# Altium PCB Template_4L.PcbDoc
Units mm, origin at the board's own origin, x right, y up, seen from the top; angles counter-clockwise.
Board outline 146.95 x 87.7 mm, 5 copper layers (Top Layer, Mid-Layer 1, Mid-Layer 2, Mid-Layer 3, Bottom Layer), stack 1.974 mm thick; 9 components, 0 nets, 17 pads, 0 vias.
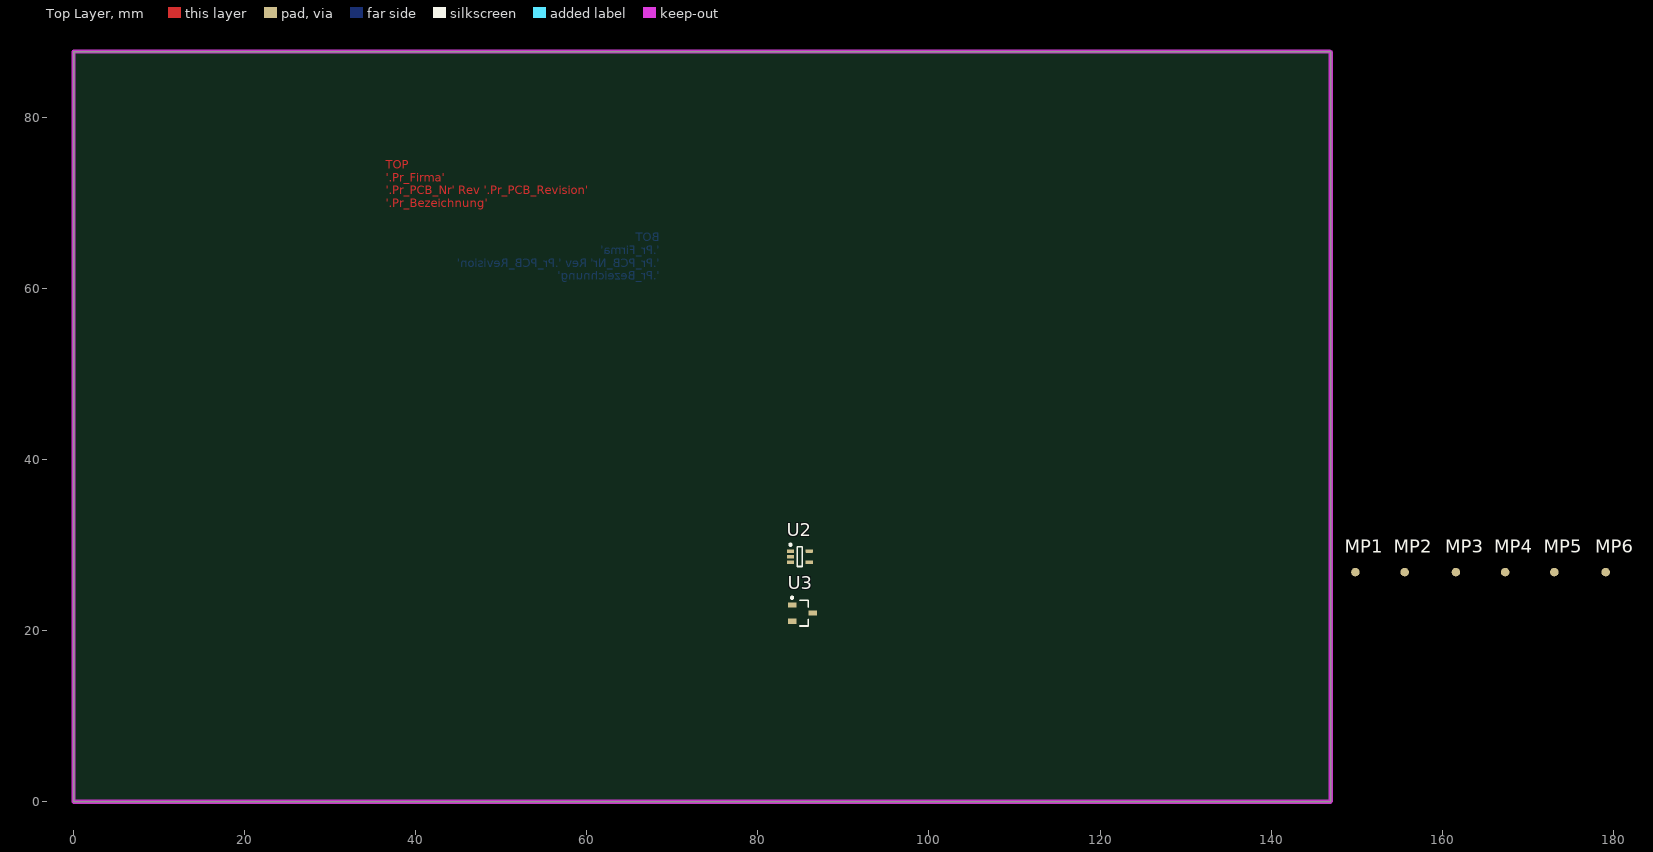
[diagram p0: Top Layer view]
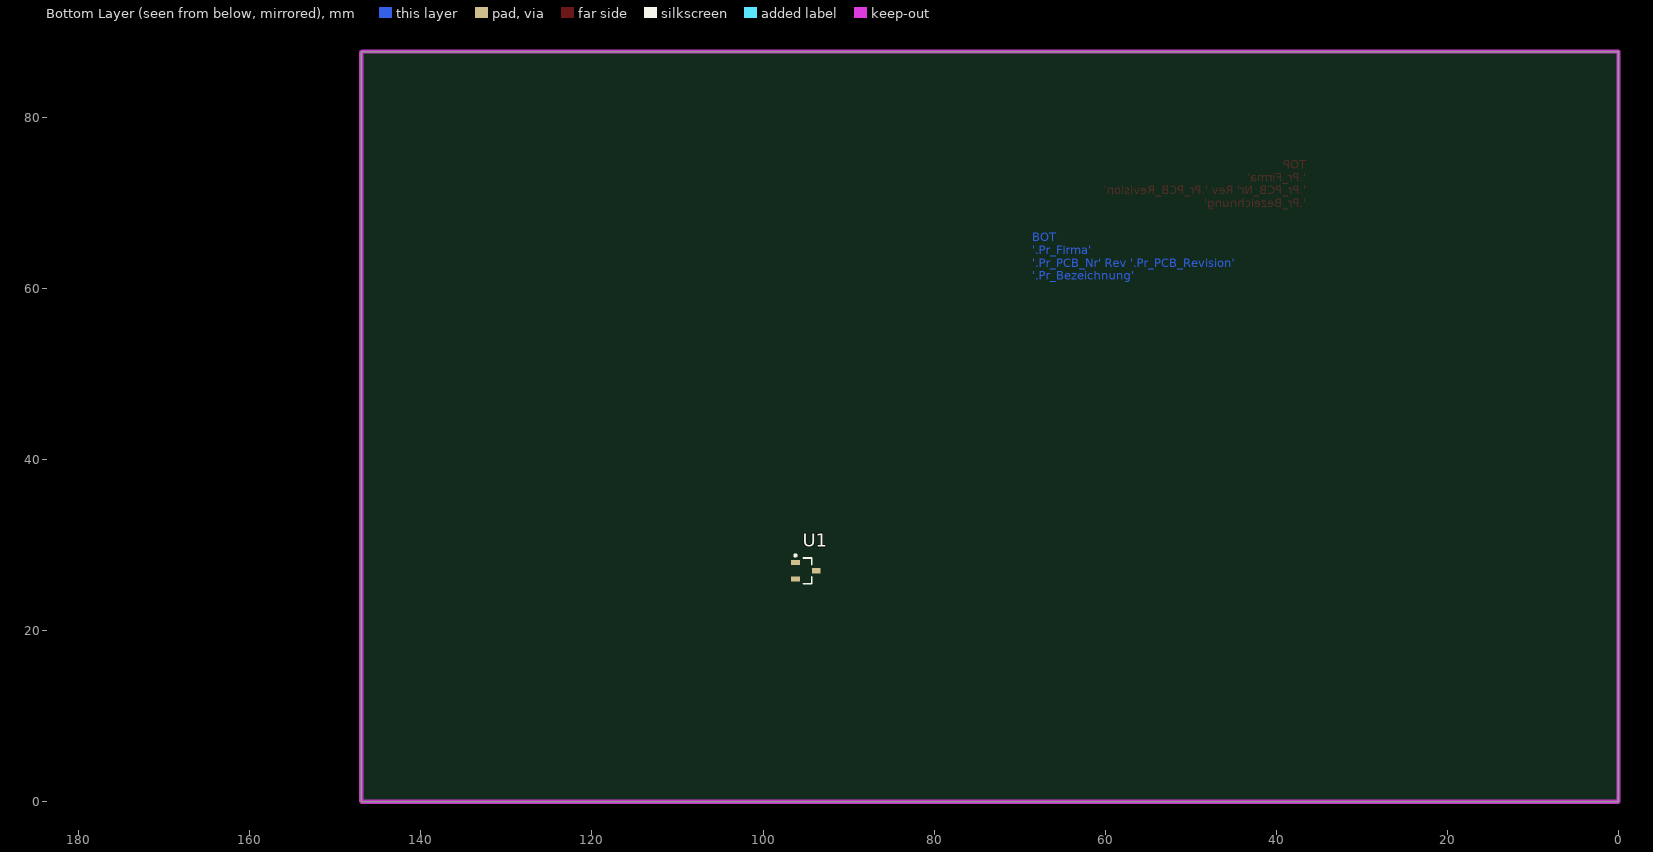
[diagram p1: Bottom Layer view, seen from below]
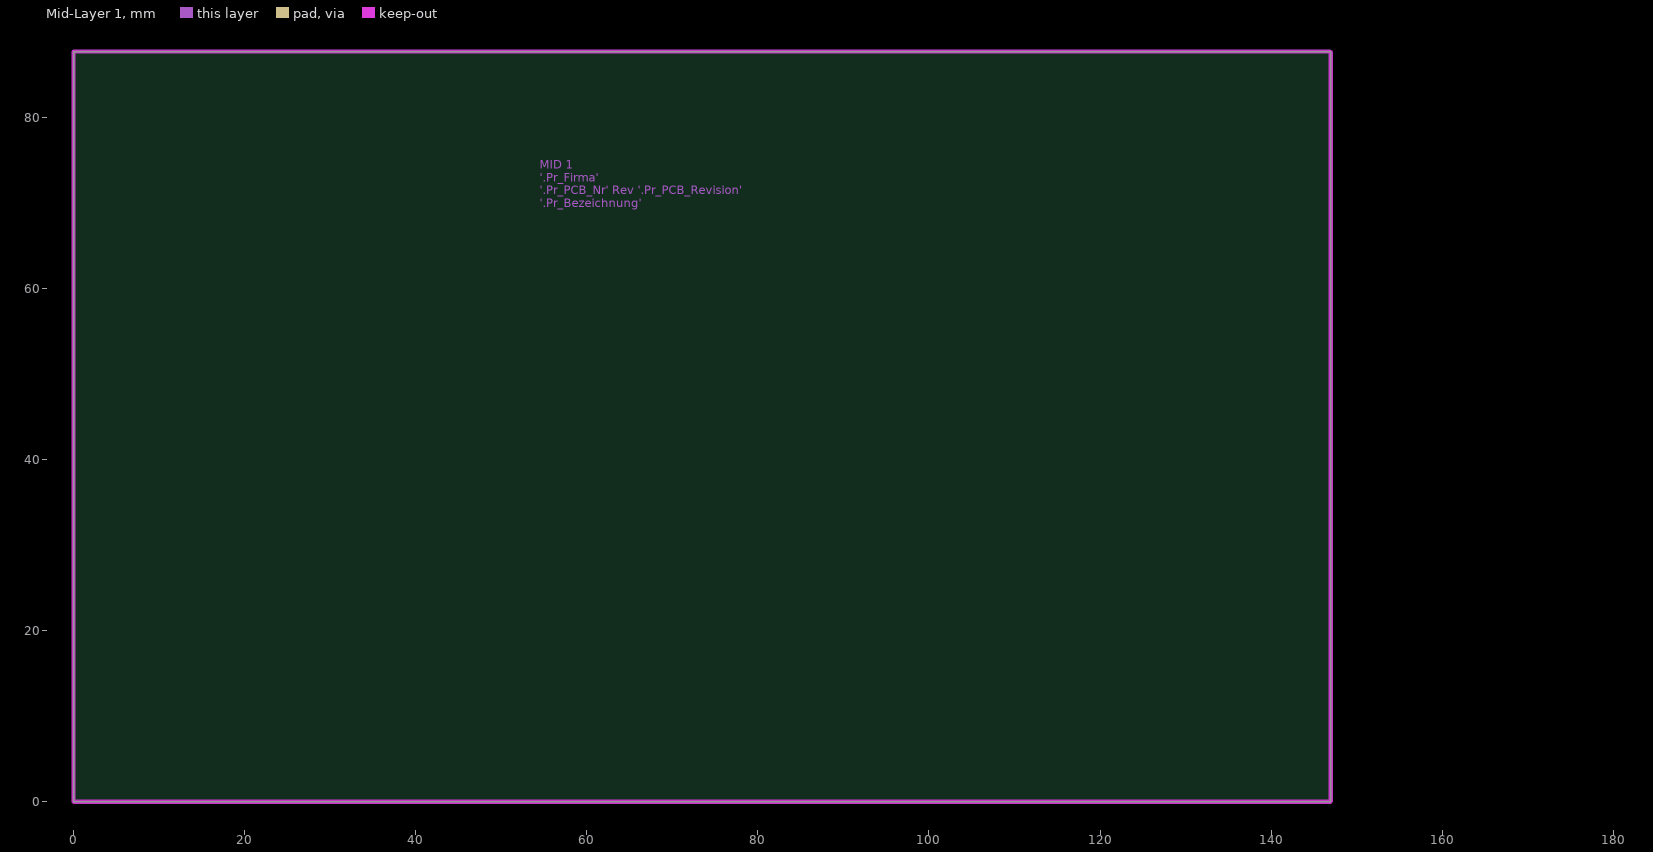
[diagram p2: Mid-Layer 1]
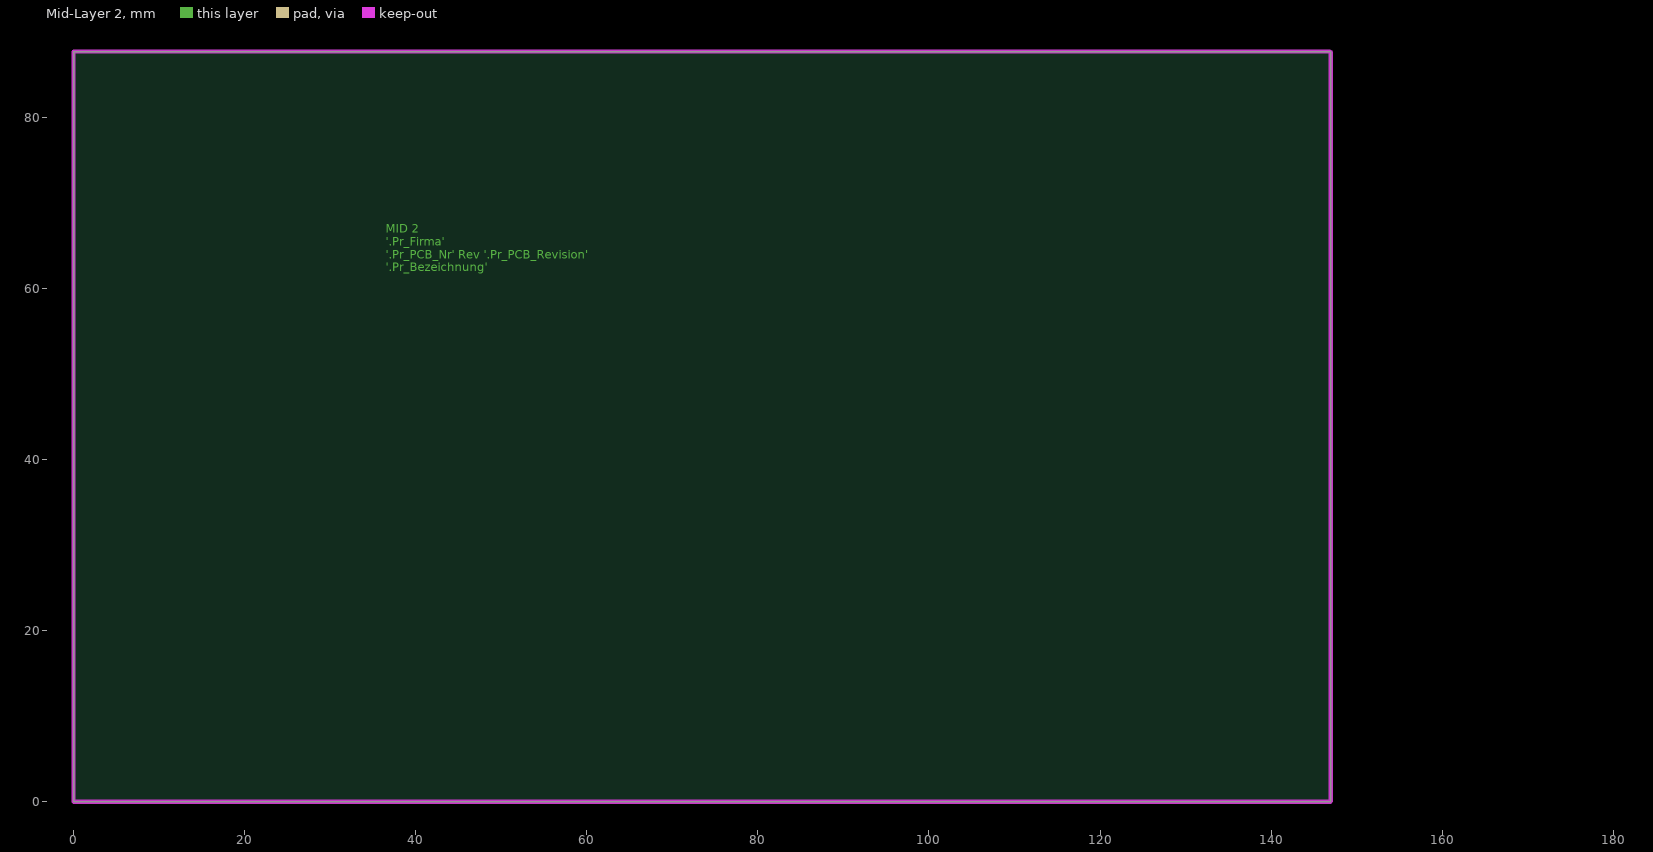
[diagram p3: Mid-Layer 2]

## Layer stack, top to bottom
Top Solder: solder mask 0.0102, Solder Resist, Dk 3.5
Top Layer: signal copper 0.018
Pregrep 1: prepreg 0.156, Dk 4.2
Mid-Layer 1: signal copper 0.035
Dielectric2: core 1.2, FR-4, Dk 4.2
Mid-Layer 2: signal copper 0.035
Pregrep 2: prepreg 0.156, Dk 4.2
Mid-Layer 3: signal copper 0.0356
Dielectric4: dielectric 0.32, FR-4, Dk 4.8
Bottom Layer: signal copper 0.018
Bottom Solder: solder mask 0.0102, Solder Resist, Dk 3.5

## Board outline
0,0.1 ccw(c0.1,0.1) 0.1,0 146.85,0 ccw(c146.85,0.1) 146.95,0.1 ccw(c146.85,0.1) 146.937,0.15 ccw(c146.85,0.2) 146.95,0.2 146.95,87.6 ccw(c146.85,87.6) 146.85,87.7 0.1,87.7 ccw(c0.1,87.6) 0,87.6

## Design rules (kind name [scope] priority, off if disabled: settings)
AcuteAngle [All] p1: minimum=6.00000000000000E+0001 checktracksonly=FALSE
BoardOutlineClearance [All] p1: gap=0.2 ignorepadtopadclearanceinfootprint=FALSE
Clearance Clearance-xPP-xTP-xTT [All] p1: gap=0.15 ignorepadtopadclearanceinfootprint=FALSE except(0: Arc-Hole Track-Hole SMDPad-Hole THPad-Hole Via-Hole Fill-Hole Poly-Hole Region-Hole Text-Hole)
ComponentClearance [All] p1: gap=0.25 collisioncheckmode=3 verticalgap=0.25 showdistances=FALSE
DiffPairsRouting Diffpairs_USB [All] p1: maxlimit=0.25 minlimit=0.15 mostfreqgap=0.25 toplayer_prefgap=0.22 toplayer_minwidth=0.15 toplayer_maxwidth=0.25 toplayer_prefwidth=0.22 midlayer1_mingap=0.25 midlayer1_minwidth=0.381 midlayer1_maxwidth=0.381 midlayer1_prefwidth=0.381 midlayer2_mingap=0.25 midlayer2_minwidth=0.381 midlayer2_maxwidth=0.381 midlayer2_prefwidth=0.381 midlayer3_mingap=0.25 midlayer3_minwidth=0.381 midlayer3_maxwidth=0.381 midlayer3_prefwidth=0.381 bottomlayer_mingap=0.25 bottomlayer_minwidth=0.381 bottomlayer_maxwidth=0.381 bottomlayer_prefwidth=0.381 maxuncoupledlength=12.5
DiffPairsRouting Diffpairs_ETH [All] p2: maxlimit=0.3 minlimit=0.15 mostfreqgap=0.25 toplayer_prefgap=0.3 toplayer_minwidth=0.15 toplayer_maxwidth=0.2 toplayer_prefwidth=0.2 midlayer1_mingap=0.25 midlayer1_maxgap=0.25 midlayer1_minwidth=0.381 midlayer1_maxwidth=0.381 midlayer1_prefwidth=0.381 midlayer2_mingap=0.25 midlayer2_maxgap=0.25 midlayer2_minwidth=0.381 midlayer2_maxwidth=0.381 midlayer2_prefwidth=0.381 midlayer3_mingap=0.25 midlayer3_maxgap=0.25 midlayer3_minwidth=0.381 midlayer3_maxwidth=0.381 midlayer3_prefwidth=0.381 bottomlayer_mingap=0.25 bottomlayer_maxgap=0.25 bottomlayer_minwidth=0.381 bottomlayer_maxwidth=0.381 bottomlayer_prefwidth=0.381 maxuncoupledlength=12.5
DiffPairsRouting DiffPairsRouting_1 [All] p3: maxlimit=0.254 minlimit=0.254 mostfreqgap=0.254 toplayer_minwidth=0.381 toplayer_maxwidth=0.381 toplayer_prefwidth=0.381 midlayer1_minwidth=0.381 midlayer1_maxwidth=0.381 midlayer1_prefwidth=0.381 midlayer2_minwidth=0.381 midlayer2_maxwidth=0.381 midlayer2_prefwidth=0.381 midlayer3_minwidth=0.381 midlayer3_maxwidth=0.381 midlayer3_prefwidth=0.381 bottomlayer_minwidth=0.381 bottomlayer_maxwidth=0.381 bottomlayer_prefwidth=0.381 maxuncoupledlength=12.7
Height [All] p1: minheight=0 maxheight=25 prefheight=12.5
HoleSize HoleSize-PTH [All] p1: absolutevalues=TRUE maxlimit=5 minlimit=0.25 maxpercent=80.000 minpercent=20.000
HoleToHoleClearance [All] p1: gap=0.15 allowstackedmicrovias=TRUE
MatchedLengths MatchLengths_xSignals_X181_U100 [InxSignalClass('xSignals_X181_U100_MatchLengthsClass')] p1: tolerance=0.1 checknetsindiffpair=FALSE checkdiffpairvsdiffpair=TRUE checkxsignals=TRUE checkothers=TRUE
MatchedLengths MatchLengths_xSignals_X180_U100 [InxSignalClass('xSignals_X180_U100_MatchLengthsClass')] p2: tolerance=0.1 checknetsindiffpair=FALSE checkdiffpairvsdiffpair=TRUE checkxsignals=TRUE checkothers=TRUE
MinimumAnnularRing "Minimum IAR  >0.45mm" [((ObjectKind = 'Pad') OR (ObjectKind = 'Via')) And (Layer = 'MultiLayer') And (HoleDiameter > AsMM(0.45))] p1: minimumring=0.25 // minimum inner annular ring for pads > 0.45mm finished hole size
MinimumAnnularRing "Minimum IAR <=0.45mm" [((ObjectKind = 'Pad') OR (ObjectKind = 'Via')) And (Layer = 'MultiLayer') And (HoleDiameter <= AsMM(0.45))] p2: minimumring=0.15 // minimum inner annular ring for pads <= 0.45mm finished hole size
MinimumSolderMaskSliver [All] p1: minsoldermaskwidth=0.025
PlaneClearance PlaneClearance-IPI [All] p1: clearance=0.2
PlaneConnect NetTie [HasFootprint('NETTIE_TH')] p1: planeconnectstyle=Direct reliefexpansion=0.508 reliefentries=4 reliefconductorwidth=0.254 reliefairgap=0.254
PlaneConnect [All] p2: pad.planeconnectstyle=Relief pad.reliefexpansion=0.4 pad.reliefentries=4 pad.reliefconductorwidth=0.2 pad.reliefairgap=0.2 via.planeconnectstyle=Direct via.reliefexpansion=0.4 via.reliefentries=4 via.reliefconductorwidth=0.2 via.reliefairgap=0.2
PolygonConnect Nettie_polygon [HasFootprint('NETTIE_TH')] p1: connectstyle=Direct reliefconductorwidth=0.254 reliefentries=4 polygonreliefangle="90 Angle" airgapwidth=0.254
PolygonConnect HIGH_CURRENT [(HasFootprint('SPT 2,5/4-V-5,0') OR HasFootprint('SPT 2,5/2-V-5,0') OR HasFootprint('INF-PG-TO263-7-1_N') OR HasFootprint('SOT223'))] p2: thpad.connectstyle=Relief thpad.reliefconductorwidth=0.7 thpad.reliefentries=4 thpad.polygonreliefangle="90 Angle" thpad.airgapwidth=0.254 smdpad.connectstyle=Direct smdpad.reliefconductorwidth=0.254 smdpad.reliefentries=4 smdpad.polygonreliefangle="90 Angle" smdpad.airgapwidth=0.254 via.connectstyle=Direct via.reliefconductorwidth=0.254 via.reliefentries=4 via.polygonreliefangle="90 Angle" via.airgapwidth=0.254
PolygonConnect BATTERY_HOLDER [HasFootprint('3035')] p3: thpad.connectstyle=Relief thpad.reliefconductorwidth=0.7 thpad.reliefentries=4 thpad.polygonreliefangle="90 Angle" thpad.airgapwidth=0.254 smdpad.connectstyle=Direct smdpad.reliefconductorwidth=0.254 smdpad.reliefentries=4 smdpad.polygonreliefangle="90 Angle" smdpad.airgapwidth=0.254 via.connectstyle=Direct via.reliefconductorwidth=0.254 via.reliefentries=4 via.polygonreliefangle="90 Angle" via.airgapwidth=0.254
PolygonConnect FGND [InNet('FGND') vs HasFootprint('M3x08S - Erdung')] p4: connectstyle=Direct reliefconductorwidth=0.2 reliefentries=4 polygonreliefangle="90 Angle" airgapwidth=0.175
PolygonConnect [All] p5: thpad.connectstyle=Relief thpad.reliefconductorwidth=0.254 thpad.reliefentries=4 thpad.polygonreliefangle="90 Angle" thpad.airgapwidth=0.254 smdpad.connectstyle=Relief smdpad.reliefconductorwidth=0.254 smdpad.reliefentries=4 smdpad.polygonreliefangle="90 Angle" smdpad.airgapwidth=0.254 via.connectstyle=Direct via.reliefconductorwidth=0.254 via.reliefentries=4 via.polygonreliefangle="90 Angle" via.airgapwidth=0.254
RoutingCorners [All] p1: cornerstyle=45-Degree minsetback=2.5 maxsetback=2.5
RoutingTopology [All] p1: topology=Daisy_Balanced
RoutingVias [(ObjectKind = 'Via')] p1: holewidth=0.3 width=0.8 viastyle="Through Hole" minholewidth=0.25 minwidth=0.6 maxholewidth=1 maxwidth=1.5
ShortCircuit "Mounting Holes" [HasFootprint('M3x08S - Erdung') AND NOT InAnyNet] p1: allowed=TRUE
ShortCircuit [All] p2: allowed=FALSE
SilkToSilkClearance [All] p1 off: silktosilkclearance=0.254
SilkToSolderMaskClearance [IsPad] p1 off: minsilkscreentomaskgap=0.254 clearancetoexposedcopper=TRUE
SolderMaskExpansion [All] p1: expansion=0.1
UnRoutedNet [All] p1: checkbadconnections=TRUE
Width Width-xTW [All] p1: maxlimit=1.5 minlimit=0.15 preferedwidth=0.2
16 further rules are at their usual default settings.

## Components (designator, comment, footprint, x,y, rotation, side; value= is the part's Value field where it differs from the comment)
MP1 "Fiducial" "REF - smaller" 149.85,26.85 r0 top
MP2 "Fiducial" "REF - smaller" 155.6,26.85 r0 top
MP3 "Fiducial" "REF - smaller" 161.6,26.85 r0 top
MP4 "Fiducial" "REF - smaller" 167.35,26.85 r0 top
MP5 "Fiducial" "REF - smaller" 173.1,26.85 r0 top
MP6 "Fiducial" "REF - smaller" 179.1,26.85 r0 top
U1 "SI2308BDS" SOT-23 95,27 r180 bottom
U2 "74LVC1G17" SOT353-1 84.9,28.65 r0 top
U3 "SI2308BDS" SOT-23 85.2,22.05 r0 top

## Footprints (in the part's own frame and the unit in brackets; to place one, negate y for a bottom-side part, rotate by r counter-clockwise, add the part's x,y. Pads: shape width x height; smd on the part's side, far side on the other; paste and mask are expansions set on the pad)
"REF - smaller" [mm]
  round 1 smd paste+0 mask+1: 1(0,0)
  Top Layer pour cut-out: 0,-1.5 -0.574,-1.386 -1.061,-1.061 -1.386,-0.574 -1.5,0 -1.5,0 -1.386,0.574 -1.061,1.061 -0.574,1.386 0,1.5 0,1.5 0.574,1.386 1.061,1.061 1.386,0.574 1.5,0 1.5,0 1.386,-0.574 1.061,-1.061 0.574,-1.386 0,-1.5
SOT353-1 [mm] "SOT353-1"
  rect 0.85x0.4 smd: 1(-1.1,0.65)
  rrect25% 0.85x0.4 smd: 2(-1.1,0) 3(-1.1,-0.65) 4(1.1,-0.65) 5(1.1,0.65)
  silkscreen extent -1.22,-1.15 0.3,1.52, body extent -1.1,-1.12 1.1,1.12, height 1.1
SOT-23 [mm] "SOT23, 3-Leads, Body 2.90x2.45mm, Pitch 0.95mm, IPC Medium Density"
  rect 1x0.6 smd: 1(-1.2,0.95) 2(-1.2,-0.95) 3(1.2,0)
  silkscreen extent -1.33,-1.5 0.7,1.92, body extent -1.3,-1.5 1.3,1.5, height 1.1

## Part data
MP1 MP2 MP3 MP4 MP5 MP6: library part MP_Fiducial
U1 U3: library part T_SI2308BDS, "Trans MOSFET N-CH 60V 1.9A 3-Pin SOT-23 T/R", Case/Package=SOT-23, Manufacturer 1=Vishay, Manufacturer Part Number 1=SI2308BDS-T1-GE3, Supplier Part Number 1=SI2308BDS-T1-GE3CT-ND, ComponentLink1Description=https://datasheet.ciiva.com/17068/0900766b80ed1e93-17068482.pdf, ComponentLink1URL=https://datasheet.ciiva.com/17068/0900766b80ed1e93-17068482.pdf, ComponentLink2Description=https://datasheet.ciiva.com/26139/si2308bd-26139136.pdf, ComponentLink2URL=https://datasheet.ciiva.com/26139/si2308bd-26139136.pdf, ComponentLink3Description=https://datasheet.ciiva.com/28603/1911751-28603483.pdf, ComponentLink3URL=https://datasheet.ciiva.com/28603/1911751-28603483.pdf, ComponentLink4Description=https://datasheet.ciiva.com/6388/si2308bd-6388236.pdf, ComponentLink4URL=https://datasheet.ciiva.com/6388/si2308bd-6388236.pdf, ComponentLink5Description=https://datasheet.ciiva.com/6388/si2308bd-6388237.pdf, ComponentLink5URL=https://datasheet.ciiva.com/6388/si2308bd-6388237.pdf, ComponentLink6Description=https://datasheet.ciiva.com/7643/si2308bd-7643237.pdf, ComponentLink6URL=https://datasheet.ciiva.com/7643/si2308bd-7643237.pdf, ComponentLink7Description=https://datasheet.ciiva.com/16221/si2308bd-16221719.pdf, ComponentLink7URL=https://datasheet.ciiva.com/16221/si2308bd-16221719.pdf, ComponentLink8Description=https://datasheet.ciiva.com/6388/si2308bd-6388235.pdf, ComponentLink8URL=https://datasheet.ciiva.com/6388/si2308bd-6388235.pdf, Supplier 1=Digi-Key
U2: library part U_G_74LVC1G17, "IC BUFFER SCHMITT TRIGGER 5TSOP", Case/Package=TSSOP, Manufacturer="NXP Semiconductors", Manufacturer Part Number=74LVC2G17GW,125, Supplier Part Number 1=1727-4218-1-ND, ComponentLink1Description=https://datasheet.ciiva.com/17290/74lvc1g17-17290989.pdf, ComponentLink1URL=https://datasheet.ciiva.com/17290/74lvc1g17-17290989.pdf, ComponentLink2Description=https://datasheet.ciiva.com/6623/74lvc1g17-6623199.pdf, ComponentLink2URL=https://datasheet.ciiva.com/6623/74lvc1g17-6623199.pdf, ComponentLink3Description=https://datasheet.ciiva.com/1833/74lvc1g17-1833130.pdf, ComponentLink3URL=https://datasheet.ciiva.com/1833/74lvc1g17-1833130.pdf, ComponentLink4Description=https://datasheet.ciiva.com/1833/74lvc1g17-1833128.pdf, ComponentLink4URL=https://datasheet.ciiva.com/1833/74lvc1g17-1833128.pdf, ComponentLink5Description=https://datasheet.ciiva.com/1833/74lvc1g17-1833129.pdf, ComponentLink5URL=https://datasheet.ciiva.com/1833/74lvc1g17-1833129.pdf, ComponentLink6Description=https://datasheet.ciiva.com/16463/74lvc2g17-16463432.pdf, ComponentLink6URL=https://datasheet.ciiva.com/16463/74lvc2g17-16463432.pdf, ComponentLink7Description=https://datasheet.ciiva.com/6623/74lvc2g17-6623158.pdf, ComponentLink7URL=https://datasheet.ciiva.com/6623/74lvc2g17-6623158.pdf, ComponentLink8Description=https://datasheet.ciiva.com/1832/74lvc2g17-1832730.pdf, ComponentLink8URL=https://datasheet.ciiva.com/1832/74lvc2g17-1832730.pdf, ComponentLink9Description=https://datasheet.ciiva.com/1832/74lvc2g17-1832731.pdf, ComponentLink9URL=https://datasheet.ciiva.com/1832/74lvc2g17-1832731.pdf, ComponentLink10Description=https://datasheet.ciiva.com/1832/74lvc2g17-1832732.pdf, ComponentLink10URL=https://datasheet.ciiva.com/1832/74lvc2g17-1832732.pdf, ComponentLink11Description=https://datasheet.ciiva.com/16199/74lvc2g17-16199742.pdf, ComponentLink11URL=https://datasheet.ciiva.com/16199/74lvc2g17-16199742.pdf, Supplier 1=Digi-Key

## Nets (pads, with @x,y where several pads share a name; then routed paths per layer and width w, separated by ;. In a path a pad name is that pad's centre, name@x,y a point inside that pad or via, vN(x,y) a via of type N, cw(c..) or ccw(c..) an arc to the next point about the centre after c; other vN are vias at no path point)
pads on no net: MP1.1 MP2.1 MP3.1 MP4.1 MP5.1 MP6.1 U1.1 U1.2 U1.3 U2.1 U2.2 U2.3 U2.4 U2.5 U3.1 U3.2 U3.3

## Keep-outs
Keep-Out Layer:
  the board outline again, w0.5

## Other copper
Top Layer:
  text "TOP / '.Pr_Firma' / '.Pr_PCB_Nr' Rev '.Pr_PCB_Revision' / '.Pr_Bezeichnung'" at 36.5,69.5 h1
Mid-Layer 1:
  text "MID 1 / '.Pr_Firma' / '.Pr_PCB_Nr' Rev '.Pr_PCB_Revision' / '.Pr_Bezeichnung'" at 54.5,69.5 h1
Mid-Layer 2:
  text "MID 2 / '.Pr_Firma' / '.Pr_PCB_Nr' Rev '.Pr_PCB_Revision' / '.Pr_Bezeichnung'" at 36.5,62 h1
Bottom Layer:
  text "BOT / '.Pr_Firma' / '.Pr_PCB_Nr' Rev '.Pr_PCB_Revision' / '.Pr_Bezeichnung'" at 68.5,61 h1

## Silkscreen, mask and mechanical layers (free items; w line width, h text height)
Top Solder:
  rectangle: 0.1,76.6 20.7,87.6
Bottom Solder:
  rectangle: 0.1,76.6 20.7,87.6
BoardOutline:
  lines w0.2: 146.85,0.1 0.1,0.1 0.1,87.6 146.85,87.6 146.85,0.2
HeaderTop:
  lines w0.127: 35.56,104.12 149.86,104.12 ; 35.56,111.74 149.86,111.74 ; 35.56,119.36 73.66,119.36 ; 73.66,96.5 73.66,111.74 73.66,126.98 ; 35.56,96.5 35.56,126.98 ; 35.56,96.5 0,96.5 0,126.98 35.56,126.98 ; 35.56,96.5 149.86,96.5 149.86,126.98 73.66,126.98 ; 35.56,126.98 73.66,126.98
  text "Erstellt:" at 36.83,124.44 h3
  text "Bezeichnung" at 74.93,124.44 h3
  text "'.Pr_Erstellt'" at 38.1,120.757 h3
  text "Geprüft" at 36.83,116.947 h3
  text "'.Pr_Bezeichnung'" at 76.454,115.55 h8
  text "'.Pr_Geprueft'" at 37.719,113.01 h3
  text "Datum:" at 36.83,109.2 h3
  text "Artikel No.:" at 74.93,109.2 h3
  text "safematic GmbH" at 3.81,106.66 h3
  text ".PRINT_DATE" at 38.1,106.152 h3
  text "'.Pr_Artikel_Nr' Rev: '.Pr_Artikel_Revision'" at 88.53,105.998 h5
  text "Elestastrasse 12" at 3.81,104.12 h3
  text "CH-7310 Bad Ragaz" at 3.81,101.58 h3
  text "Dateiname:" at 36.83,101.58 h3
  text "PCB No.:" at 74.93,101.58 h3
  text ".PCB_FILE_NAME_NO_PATH" at 38.1,98.532 h3
Drill Drawing:
  drawing of 320 lines, arcs and shapes, not listed
  text "Symbol" at 152.808,84.825 h1.83
  text "Count" at 165.657,84.825 h1.83
  text "Hole Size" at 176.678,84.825 h1.83
  text "Plated" at 195.012,84.825 h1.83
  text "Hole Type" at 207.861,84.825 h1.83
  text "Drill Layer Pair" at 226.5,84.825 h1.83
  text "Via/Pad" at 256.717,84.825 h1.83
  text "Layer" at 152.215,75.617 h1.52
  text "Name" at 162.627,75.617 h1.52
  text "Material" at 186.75,75.617 h1.52
  text "Thickness" at 208.588,75.617 h1.52
  text "Constant" at 225.094,75.617 h1.52
  text "Board Layer Stack" at 239.568,75.617 h1.52
  text "1" at 152.215,72.569 h1.52
  text "Top Overlay" at 162.627,72.569 h1.52
  text "2" at 152.215,69.521 h1.52
  text "Top Solder" at 162.627,69.521 h1.52
  text "Solder Resist" at 186.75,69.521 h1.52
  text "0.010mm" at 208.588,69.521 h1.52
  text "3.5" at 225.094,69.521 h1.52
  text "3" at 152.215,66.473 h1.52
  text "Top Layer" at 162.627,66.473 h1.52
  text "Copper" at 186.75,66.473 h1.52
  text "0.018mm" at 208.588,66.473 h1.52
  text "4" at 152.215,63.425 h1.52
  text "2xPregrep 1080" at 162.627,63.425 h1.52
  text "0.156mm" at 208.588,63.425 h1.52
  text "4.2" at 225.094,63.425 h1.52
  text "5" at 152.215,60.377 h1.52
  text "Mid-Layer 1" at 162.627,60.377 h1.52
  text "Copper" at 186.75,60.377 h1.52
  text "0.035mm" at 208.588,60.377 h1.52
  text "6" at 152.215,57.329 h1.52
  text "Dielectric2" at 162.627,57.329 h1.52
  text "FR-4" at 186.75,57.329 h1.52
  text "1.200mm" at 208.588,57.329 h1.52
  text "4.2" at 225.094,57.329 h1.52
  text "7" at 152.215,54.281 h1.52
  text "Mid-Layer 2" at 162.627,54.281 h1.52
  text "Copper" at 186.75,54.281 h1.52
  text "0.035mm" at 208.588,54.281 h1.52
  text "8" at 152.215,51.233 h1.52
  text "2xPregrep 1080" at 162.627,51.233 h1.52
  text "0.156mm" at 208.588,51.233 h1.52
  text "4.2" at 225.094,51.233 h1.52
  text "9" at 152.215,48.185 h1.52
  text "Bottom Layer" at 162.627,48.185 h1.52
  text "Copper" at 186.75,48.185 h1.52
  text "0.018mm" at 208.588,48.185 h1.52
  text "10" at 152.215,45.137 h1.52
  text "Bottom Solder" at 162.627,45.137 h1.52
  text "Solder Resist" at 186.75,45.137 h1.52
  text "0.010mm" at 208.588,45.137 h1.52
  text "3.5" at 225.094,45.137 h1.52
  text "11" at 152.215,42.089 h1.52
  text "Bottom Overlay" at 162.627,42.089 h1.52
  text "Erstellt:" at 221.3,30.942 h3
  text "Bezeichnung" at 259.4,30.942 h3
  text "'.Pr_Erstellt'" at 222.57,27.259 h3
  text "Geprüft" at 221.3,23.449 h3
  text "'.Pr_Bezeichnung'" at 260.924,22.052 h8
  text "'.Pr_Geprueft'" at 222.189,19.512 h3
  text "Datum:" at 221.3,15.702 h3
  text "Artikel No.:" at 259.4,15.702 h3
  text "safematic GmbH" at 188.28,13.162 h3
  text ".PRINT_DATE" at 222.57,12.654 h3
  text "'.Pr_Artikel_Nr' Rev: '.Pr_Artikel_Revision'" at 273,12.5 h5
  text "Elestastrasse 12" at 188.28,10.622 h3
  text "CH-7310 Bad Ragaz" at 188.28,8.082 h3
  text "Dateiname:" at 221.3,8.082 h3
  text "Schema No.:" at 259.4,8.082 h3
  text ".PCB_FILE_NAME_NO_PATH" at 222.57,5.034 h3
  text "'.Pr_PCB_Nr' Rev: '.Pr_PCB_Revision'" at 273.127,4.896 h5
HeaderBottom:
  lines w0.127: 0,104.12 114.3,104.12 ; 0,111.74 114.3,111.74 ; 76.2,96.5 76.2,111.74 76.2,126.98 ; 76.2,119.36 114.3,119.36 ; 76.2,126.98 0,126.98 0,96.5 114.3,96.5 ; 76.2,126.98 114.3,126.98 ; 114.3,96.5 114.3,126.98 ; 114.3,96.5 149.86,96.5 149.86,126.98 114.3,126.98
  text "Bezeichnung" at 74.93,124.44 h3
  text "Erstellt:" at 113.03,124.44 h3
  text "'.Pr_Erstellt'" at 111.76,120.757 h3
  text "Geprüft" at 113.03,116.947 h3
  text "'.Pr_Bezeichnung'" at 73.406,115.55 h8
  text "'.Pr_Geprueft'" at 112.141,113.01 h3
  text "Artikel No.:" at 74.93,109.2 h3
  text "Datum:" at 113.03,109.2 h3
  text "safematic GmbH" at 146.05,106.66 h3
  text ".PRINT_DATE" at 111.76,106.152 h3
  text "'.Pr_Artikel_Nr' Rev: '.Pr_Artikel_Revision'" at 61.33,105.998 h5
  text "Elestastrasse 12" at 146.05,104.12 h3
  text "PCB No.:" at 74.93,101.58 h3
  text "Dateiname:" at 113.03,101.58 h3
  text "CH-7310 Bad Ragaz" at 146.05,101.58 h3
  text ".PCB_FILE_NAME_NO_PATH" at 111.76,98.532 h3
  text "'.Pr_PCB_Nr' Rev: '.Pr_PCB_Revision'" at 61.203,98.395 h5

## Dimensions
0.1,0.1 to 0.1,87.6 on Drill Drawing
0.1,87.6 to 146.85,87.6 on Drill Drawing